# EAGLE board StackableWiFi (EAGLE 6.5.0)
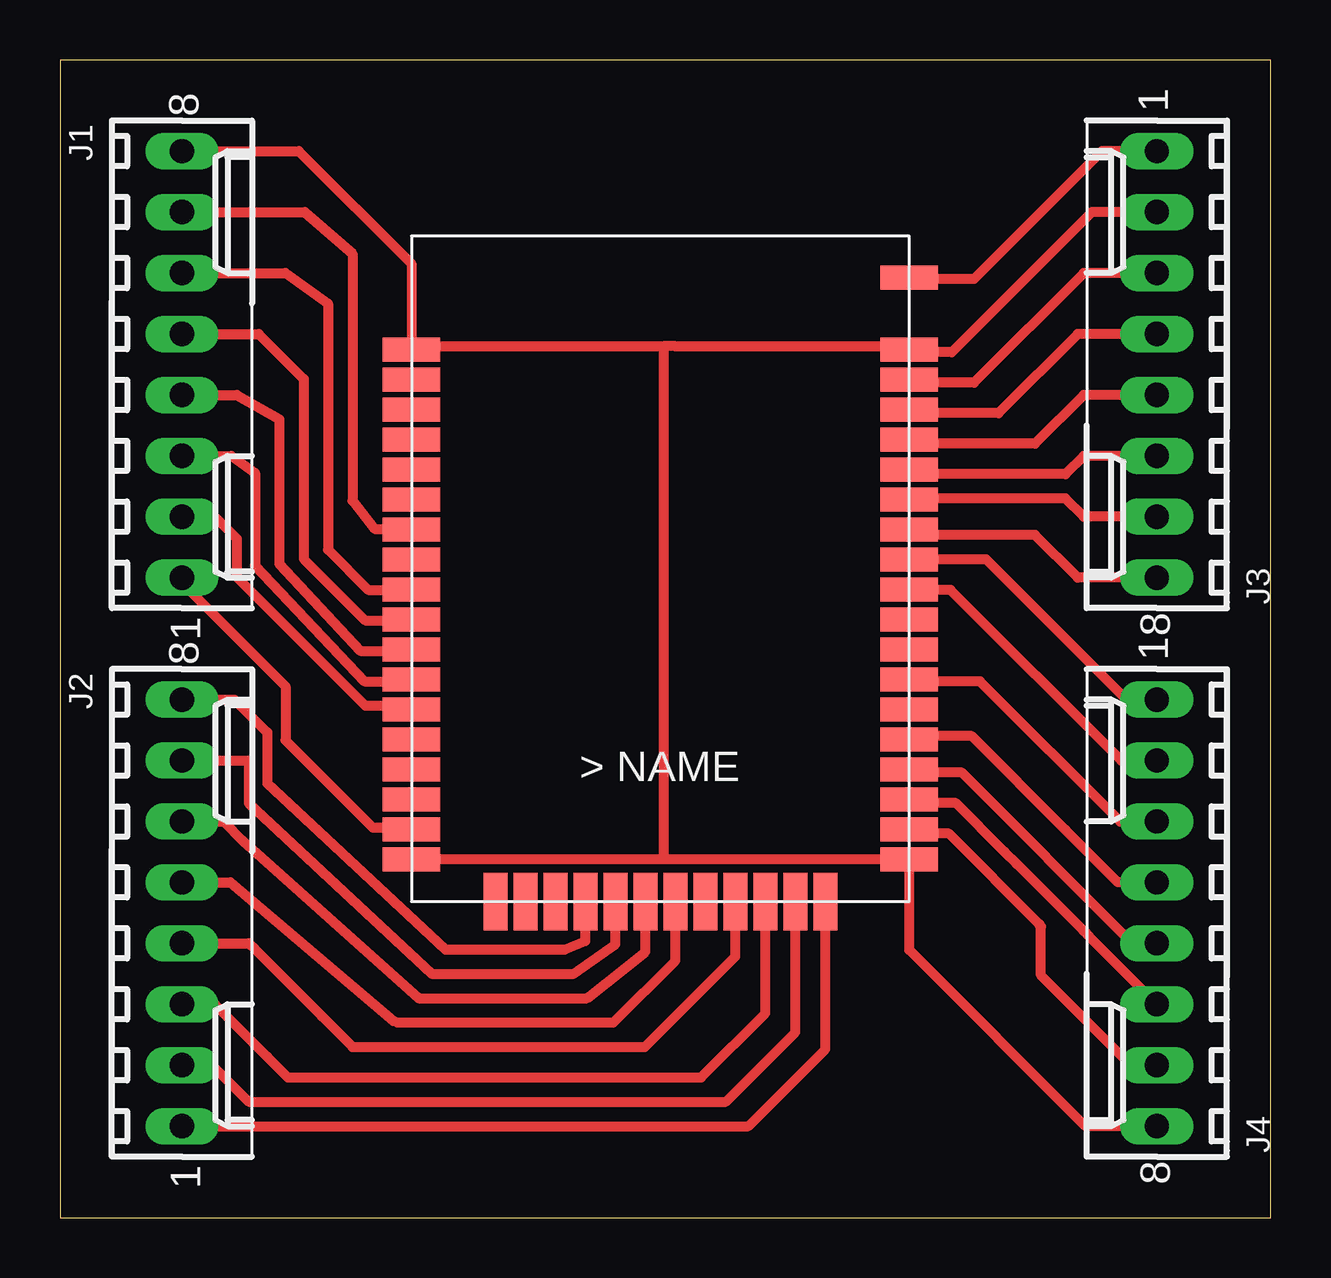
[diagram p0: board, top side]

Size 50.47 x 48.25 mm. Coordinates in mm from the lower left corner, seen from the top.
Outline: 0,0 50.47,0 50.47,48.25 0,48.25 0,0
Copper layers (1*16): Top 0.035mm / dielectric 1.5mm / Bottom 0.035mm
Design rules "default": minimum track width 10mil, minimum drill 24mil, track to track 8mil, track to pad 8mil, pad to pad 8mil, via to via 8mil, smd to smd 8mil, copper to edge 40mil, drill to drill 8mil, minimum pad ring 10mil, minimum via ring 8mil, stop-mask expansion 4mil, vias tented up to drill 0mil, thermal gap 10mil

## Footprints (pad centres in the part's own frame; a part is rotated, then mirrored left to right if it is on the bottom)
6410-08 = drill 1.016 long: 1 8.89,0; 2 6.35,0; 3 3.81,0; 4 1.27,0; 5 -1.27,0; 6 -3.81,0; 7 -6.35,0; 8 -8.89,0
WIZFI210 = smd 2.4 x 1: 1 -10.75,9.5; 2 -10.75,8.25; 3 -10.75,7; 4 -10.75,5.75; 5 -10.75,4.5; 6 -10.75,3.25; 7 -10.75,2; 8 -10.75,0.75; 9 -10.75,-0.5; 10 -10.75,-1.75; 11 -10.75,-3; 12 -10.75,-4.25; 13 -10.75,-5.5; 14 -10.75,-6.75; 15 -10.75,-8; 16 -10.75,-9.25; 17 -10.75,-10.5; 18 -10.75,-11.75; 31 10,-11.75; 32 10,-10.5; 33 10,-9.25; 34 10,-8; 35 10,-6.75; 36 10,-5.5; 37 10,-4.25; 38 10,-3; 39 10,-1.75; 40 10,-0.5; 41 10,0.75; 42 10,2; 43 10,3.25; 44 10,4.5; 45 10,5.75; 46 10,7; 47 10,8.25; 48 10,9.5; 49 10,12.5 | smd 1 x 2.4: 19 -7.25,-13.5; 20 -6,-13.5; 21 -4.75,-13.5; 22 -3.5,-13.5; 23 -2.25,-13.5; 24 -1,-13.5; 25 0.25,-13.5; 26 1.5,-13.5; 27 2.75,-13.5; 28 4,-13.5; 29 5.25,-13.5; 30 6.5,-13.5

## Placement (x,y rotation side)
J1  22-27-2081-08  [6410-08]  5.08,35.56 270 top
J2  22-27-2081-08  [6410-08]  5.08,12.7 270 top
J3  22-27-2081-08  [6410-08]  45.72,35.56 90 top
J4  22-27-2081-08  [6410-08]  45.72,12.7 90 top
WIFI1  WIZFI210  [WIZFI210]  25.4,26.67 0 top

## Library data of the parts
J1-J4 = con-molex; OC_FARNELL: unknown; OC_NEWARK: unknown
WIFI1 = SmartSensorWifi

## Nets
N$1: J1.8 WIFI1.1
N$2: J1.7 WIFI1.7
N$3: J1.6 WIFI1.9
N$4: J1.5 WIFI1.10
N$5: J1.4 WIFI1.11
N$6: J1.3 WIFI1.12
N$7: J1.2 WIFI1.13
N$8: J1.1 WIFI1.17
N$9: J4.8 WIFI1.18 WIFI1.31
N$10: J2.8 WIFI1.22
N$11: J2.7 WIFI1.23
N$12: J2.6 WIFI1.24
N$13: J2.5 WIFI1.25
N$14: J2.4 WIFI1.27
N$15: J2.3 WIFI1.28
N$16: J2.2 WIFI1.29
N$17: J2.1 WIFI1.30
N$19: J4.7 WIFI1.32
N$20: J4.6 WIFI1.33
N$21: J4.5 WIFI1.34
N$22: J4.4 WIFI1.35
N$23: J4.3 WIFI1.37
N$24: J4.2 WIFI1.40
N$25: J4.1 WIFI1.41
N$26: J3.8 WIFI1.42
N$27: J3.7 WIFI1.43
N$28: J3.6 WIFI1.44
N$29: J3.5 WIFI1.45
N$30: J3.4 WIFI1.46
N$31: J3.3 WIFI1.47
N$32: J3.2 WIFI1.48
N$33: J3.1 WIFI1.49

## Tracks (layer width: path | path; a pad name or v marks a point on that pad's centre or on a via)
N$1
  Top 0.406: J1.8 9.95,44.45 14.65,39.75 WIFI1.1
N$2
  Top 0.406: J1.7 10.2,41.91 12.19,40.17 12.19,29.88 13.12,28.7 14.65,28.7 WIFI1.7
N$3
  Top 0.406: J1.6 9.4,39.37 11.18,38.1 11.18,27.84 12.85,26.16 WIFI1.9
N$4
  Top 0.406: J1.5 8.28,36.83 10.16,34.95 10.16,27.45 12.72,24.89 14.65,24.89 WIFI1.10
N$5
  Top 0.406: J1.4 7.37,34.29 9.14,33.27 9.14,27.25 12.52,23.62 14.65,23.62 WIFI1.11
N$6
  Top 0.406: J1.3 7.16,31.75 8.13,31.03 8.13,27.17 12.69,22.35 14.65,22.35 WIFI1.12
N$7
  Top 0.406: J1.2 6.45,29.21 7.37,28.29 7.37,26.69 12.72,21.34 14.65,21.34 WIFI1.13
N$8
  Top 0.406: J1.1 5.08,26.46 7.92,23.62 9.4,22.14 9.4,19.89 13.03,16.26 14.65,16.26 WIFI1.17
N$9
  Top 0.406: WIFI1.18 WIFI1.31 35.4,11.16 42.74,3.81 J4.8
N$10
  Top 0.406: J2.8 7.27,21.59 8.64,20.22 8.64,18.09 16.05,11.18 21.04,11.18 21.9,11.52 WIFI1.22
N$11
  Top 0.406: J2.7 7.87,19.05 7.87,17.26 15.49,10.16 21.41,10.16 23.15,11.39 WIFI1.23
N$12
  Top 0.406: J2.6 6.82,16.51 7.62,15.71 14.94,9.14 21.96,9.14 24.4,11.08 WIFI1.24
N$13
  Top 0.406: J2.5 7.11,13.97 13.9,8.19 14.06,8.13 23.07,8.13 25.65,10.71 WIFI1.25
N$14
  Top 0.406: J2.4 7.87,11.43 8.13,11.18 10.92,8.38 12.19,7.11 24.38,7.11 28.15,10.88 WIFI1.27
N$15
  Top 0.406: J2.3 6.45,8.89 8.64,6.71 9.5,5.84 26.72,5.84 29.4,8.52 WIFI1.28
N$16
  Top 0.406: J2.2 6.35,6.35 7.87,4.83 27.76,4.83 30.65,7.72 WIFI1.29
N$17
  Top 0.406: J2.1 28.69,3.81 31.9,7.02 WIFI1.30
N$19
  Top 0.406: J4.7 44.64,6.35 40.89,10.1 40.89,12.12 40.82,12.22 37.04,16 35.4,16 WIFI1.32
N$20
  Top 0.406: J4.6 42.93,11.68 42.67,11.94 39.88,14.73 39.37,15.24 37.34,17.27 35.4,17.27 WIFI1.33
N$21
  Top 0.406: J4.5 44.7,11.43 37.59,18.54 35.4,18.54 WIFI1.34
N$22
  Top 0.406: J4.4 44.09,13.97 41.91,16.16 38,20.07 35.4,20.07 WIFI1.35
N$23
  Top 0.406: J4.3 44.2,16.51 38.35,22.35 35.4,22.35 WIFI1.37
N$24
  Top 0.406: J4.2 44.23,19.05 37.12,26.16 WIFI1.40
N$25
  Top 0.406: J4.1 44.45,21.59 38.61,27.43 35.4,27.43 WIFI1.41
N$26
  Top 0.406: J3.8 42.42,26.67 40.64,28.45 35.4,28.45 WIFI1.42
N$27
  Top 0.406: J3.7 42.67,29.21 41.91,29.97 35.4,29.97 WIFI1.43
N$28
  Top 0.406: J3.6 42.67,31.75 41.91,30.99 35.4,30.99 WIFI1.44
N$29
  Top 0.406: J3.5 42.67,34.29 40.64,32.26 35.4,32.26 WIFI1.45
N$30
  Top 0.406: J3.4 42.42,36.83 39.12,33.53 35.4,33.53 WIFI1.46
N$31
  Top 0.406: J3.3 42.67,39.37 38.1,34.8 35.4,34.8 WIFI1.47
N$32
  Top 0.406: J3.2 43.02,41.91 37.17,36.07 35.4,36.07 WIFI1.48
N$33
  Top 0.406: J3.1 43.43,44.45 38.1,39.12 35.4,39.12 WIFI1.49
S$1
  Top 0.406: 15.49,36.32 25.15,36.32 | 35.31,36.32 25.65,36.32 25.15,36.32 | 25.15,36.32 25.15,14.99